# Altium PCB pumpController.PcbDoc
Units mm, origin at the board's own origin, x right, y up, seen from the top; angles counter-clockwise.
Board outline 73.76 x 46.73 mm, 2 copper layers (Top Layer, Bottom Layer); 53 components, 38 nets, 193 pads, 42 vias.
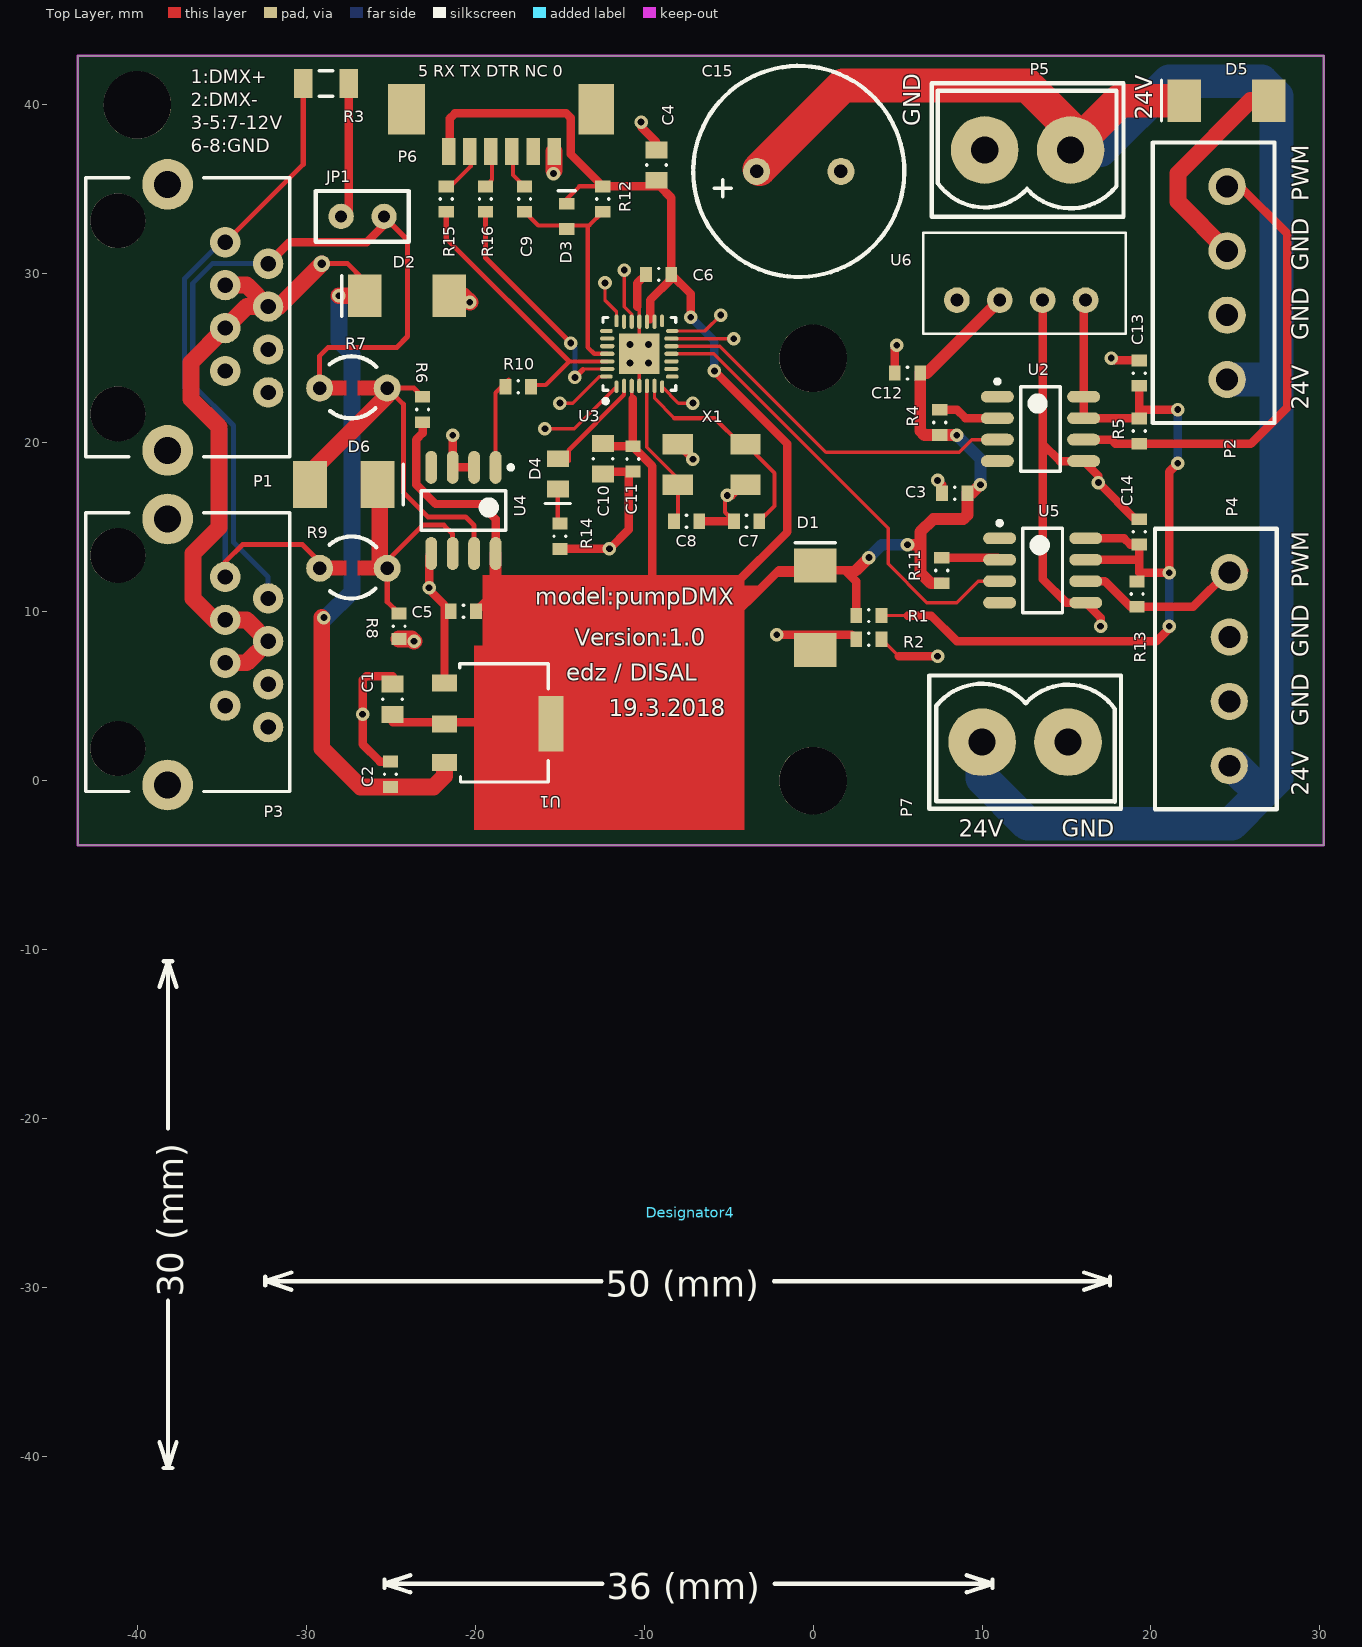
[diagram p0: Top Layer view]
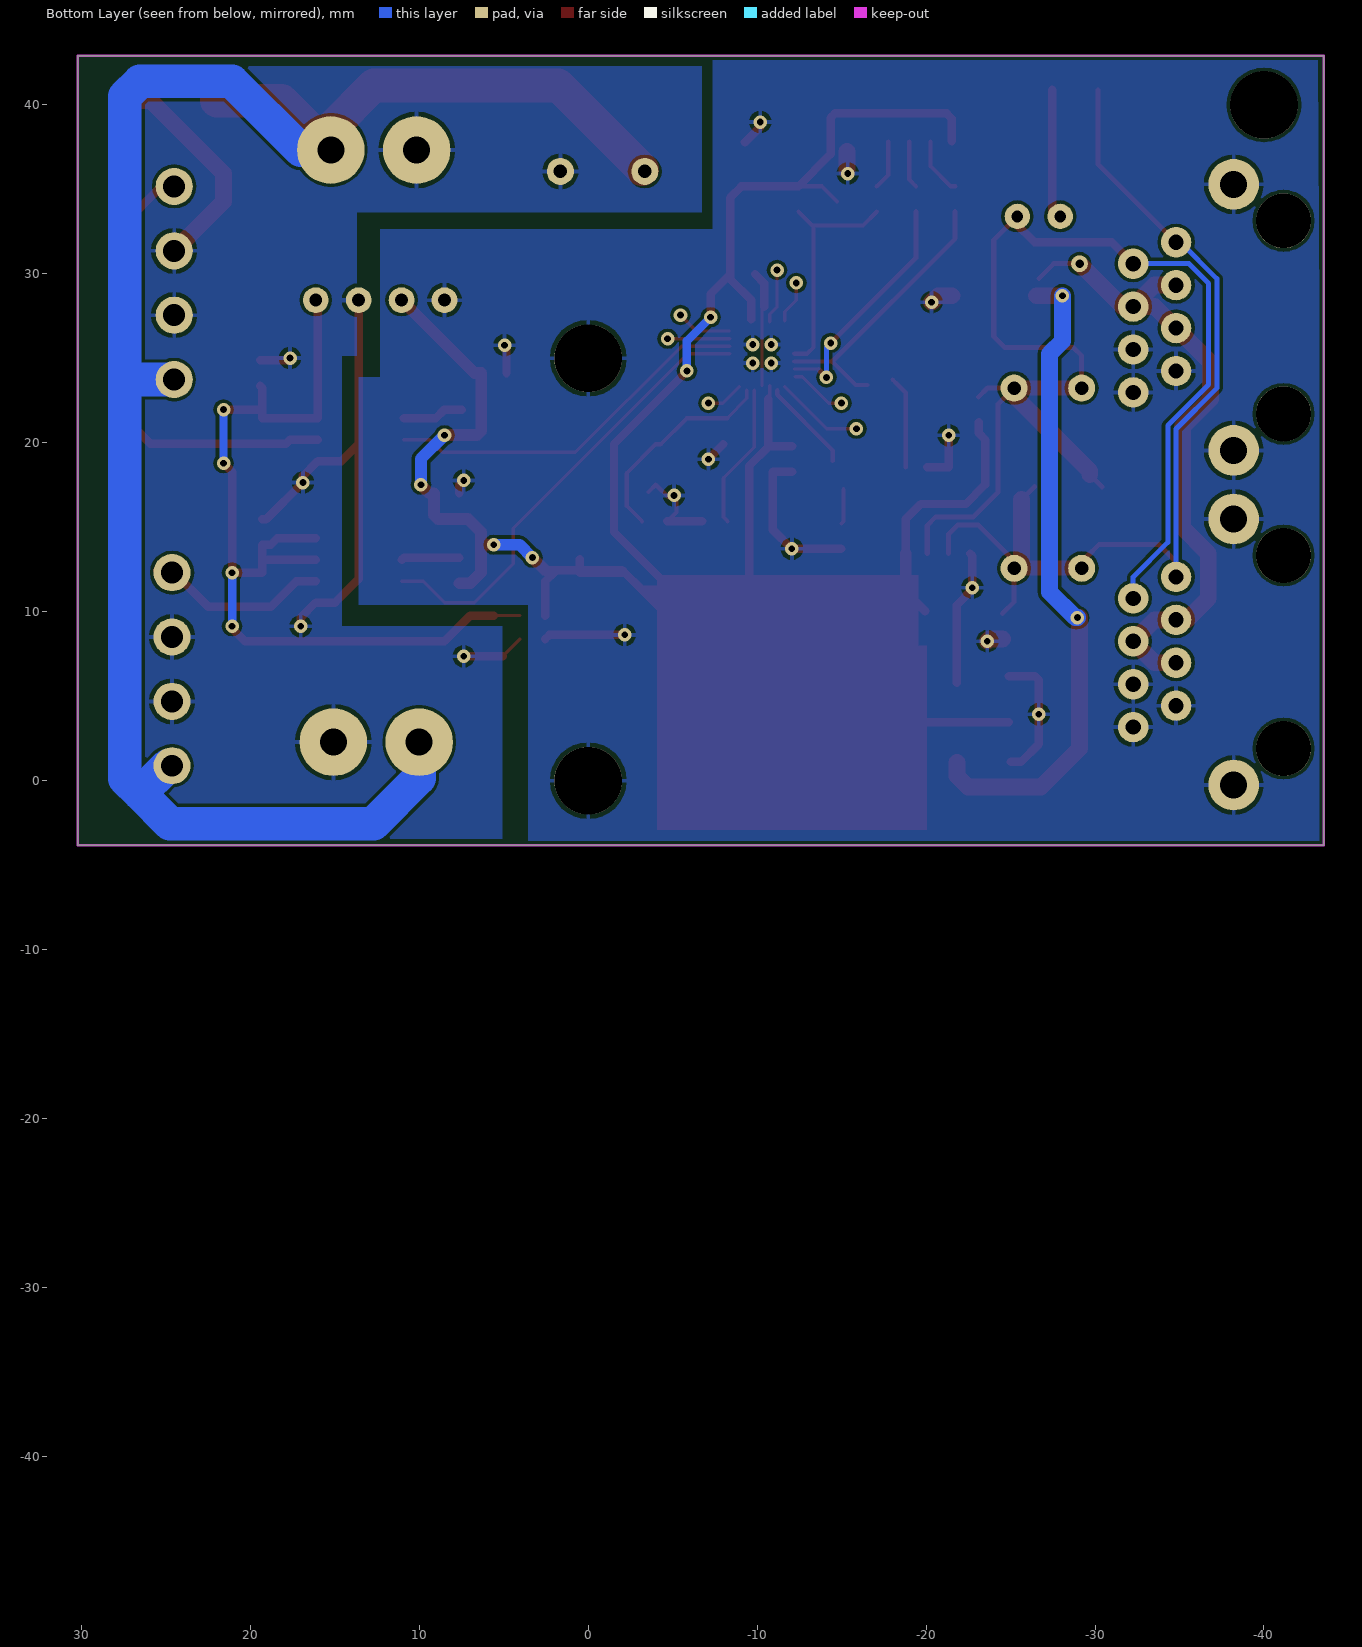
[diagram p1: Bottom Layer view, seen from below]

## Layer stack, top to bottom
Top Solder: solder mask 0.0102, Solder Resist, Dk 3.5
Top Layer: signal copper 0.0356
Dielectric 1: dielectric 0.32, FR-4, Dk 4.8
Bottom Layer: signal copper 0.0356
Bottom Solder: solder mask 0.0102, Solder Resist, Dk 3.5

## Board outline
-43.536,-3.815 30.226,-3.815 30.226,42.919 -43.536,42.919

## Design rules (kind name [scope] priority, off if disabled: settings)
Clearance [All] p1: gap=0.19 ignorepadtopadclearanceinfootprint=FALSE except(0: Arc-Hole Track-Hole SMDPad-Hole THPad-Hole Via-Hole Fill-Hole Poly-Hole Region-Hole Text-Hole)
HoleSize [All] p1: absolutevalues=TRUE maxlimit=10 minlimit=0.025 maxpercent=80.000 minpercent=20.000
PolygonConnect [All] p1: connectstyle=Relief reliefconductorwidth=0.254 reliefentries=4 polygonreliefangle="90 Angle" airgapwidth=0.254
RoutingVias [All] p1: holewidth=0.4 width=0.8 viastyle="Through Hole" minholewidth=0.4 minwidth=0.8 maxholewidth=0.4 maxwidth=0.8
SilkToSilkClearance [All] p1: silktosilkclearance=0.15
SilkToSolderMaskClearance [IsPad] p1: minsilkscreentomaskgap=0.15 clearancetoexposedcopper=TRUE
SolderMaskExpansion [All] p1: expansion=0.102
Width [All] p1: maxlimit=5 minlimit=0.2 preferedwidth=0.254
27 further rules are at their usual default settings.

## Components (designator, comment, footprint, x,y, rotation, side; value= is the part's Value field where it differs from the comment)
C1 "10uF" 0805 -24.892,4.821 r90 top
C2 "100nF" 0603 -25.019,0.376 r270 top
C3 "100nF" 0603 8.382,17.013 r0 top
C4 "10uF" 0805 -9.271,36.444 r90 top
C5 "100nF" 0603 -20.701,10.028 r0 top
C6 "100nF" 0603 -9.144,29.967 r0 top
C7 "22pF" 0603 -3.937,15.362 r180 top
C8 "22pF" 0603 -7.493,15.362 r0 top
C9 "100nF" 0603 -17.082,34.43 r90 top
C10 "10uF" 0805 -12.446,19.05 r270 top
C11 "100nF" 0603 -10.668,19.045 r270 top
C12 "100nF" 0603 5.588,24.125 r0 top
C13 "100nF" 0603 19.304,24.125 r90 top
C14 "100nF" 0603 19.304,14.727 r90 top
C15 "1000uF" CAPARADIALD12.5H20F5 1.651,36.063 r180 top
D1 "not mounted" MELF 0.127,7.742 r90 top value=5.1V
D2 "SS34" MELF -21.543,28.702 r180 top
D3 "ZLLS350TA" 0603pol -14.58,33.401 r90 top
D4 "GREEN" 0805pol -15.113,18.156 r270 top
D5 "SS34" MELF 26.971,40.254 r180 top
D6 "P008A" DO-214 -29.781,17.526 r0 top
Designator4 "Comment" "E-REGISTRATION STENCIL_EUROCIRUIT" -25.273,-10.541 r0 top
JP1 "Jumper DMX Terminal resistor" Jumper -27.94,33.401 r0 top
P1 "DMX" RJ45__socket_right -32.258,24.252 r180 top
P2 "Header 4" PHO_3.81_180_4x 24.511,23.744 r90 top
P3 "DMX" RJ45__socket_right -32.258,4.44 r180 top
P4 "Header 4" PHO_3.81_180_4x 24.638,0.884 r90 top
P5 "24V" "ALIME 5_08 180" 10.16,37.333 r0 top
P6 "Header 6" Header6_1.25_micro_JST_Axial -15.327,37.251 r180 top
P7 "24V" "ALIME 5_08 180" 15.088,2.281 r180 top
R1 "100R" 0603 3.302,9.774 r0 top
R2 "100R" 0603 3.302,8.377 r0 top
R3 "120R" 1206 -28.829,41.275 r180 top
R4 "470R" 0603 7.493,21.204 r90 top
R5 "10k" 0603 19.304,20.696 r270 top
R6 "10k" 0603 -23.114,21.971 r90 top
R7 "1K" MZ6 -29.21,23.241 r0 top
R8 "10k" 0603 -24.511,9.144 r270 top
R9 "1K" MZ6 -29.21,12.573 r0 top
R10 "1K" 0603 -17.45,23.317 r0 top
R11 "470R" 0603 7.62,12.441 r90 top
R12 "100k" 0603 -12.446,34.43 r90 top
R13 "10k" 0603 19.177,11.044 r270 top
R14 "2k2" 0603 -14.986,14.473 r270 top
R15 "100R" 0603 -21.717,34.43 r270 top value=100k
R16 "100R" 0603 -19.399,34.43 r270 top value=100k
U1 "LD1117S50CTR" SOT-223 -18.669,3.424 r270 top value=5V
U2 "HCPL-0600" so-8 13.462,20.823 r0 top
U3 "ATMEGA328P" ATM328P_MMH -10.287,27.168 r90 top
U4 "LTC485IS8  (év. CS8)" so-8 -20.701,15.997 r270 top
U5 "HCPL-0600" so-8 13.589,12.441 r0 top
U6 "NKE0505SC" SIL4 8.509,28.443 r0 top
X1 "8MHz" osc -6.564,20.378 r0 top

## Footprints (in the part's own frame and the unit in brackets; to place one, negate y for a bottom-side part, rotate by r counter-clockwise, add the part's x,y. Pads: shape width x height; smd on the part's side, far side on the other; paste and mask are expansions set on the pad)
0603 [mm] "Chip Resistor, Body 1.6x0.8mm, IPC High Density, EIA 0603"
  rect 0.7x0.9 smd: 1(-0.75,0) 2(0.75,0)
  silkscreen extent -0.01,-0.35 0.01,0.35, body extent -0.85,-0.48 0.85,0.48, height 0.6
0603pol [mm] "Chip Resistor, Body 1.6x0.8mm, IPC High Density, EIA 0603"
  rect 0.7x0.9 smd: 1(-0.75,0) 2(0.75,0)
  silkscreen extent 1.52,-0.51 1.52,0.51, body extent -0.85,-0.48 0.85,0.48, height 0.6
0805 [mm] "Chip Resistor, Body 2.0x1.3mm, IPC High Density, EIA 0805"
  rect 1x1.3 smd: 1(-0.9,0) 2(0.9,0)
  silkscreen extent -0.01,-0.58 0.01,0.58, body extent -1.07,-0.7 1.07,0.7, height 0.65
0805pol [mm] "Chip Resistor, Body 2.0x1.3mm, IPC High Density, EIA 0805"
  rect 1x1.3 smd: 1(-0.9,0) 2(0.9,0)
  silkscreen extent 1.75,-0.75 1.75,0.75, body extent -1.07,-0.7 1.07,0.7, height 0.65
1206 [mm] "Chip Resistor, Body 3.2x1.6mm, IPC High Density, EIA 1206"
  rect 1.1x1.7 smd: 1(-1.35,0) 2(1.35,0)
  silkscreen extent -0.4,-0.75 0.4,0.75, body extent -1.68,-0.87 1.68,0.87, height 0.7
"ALIME 5_08 180" [mm]
  round 4 hole 1.6: 1(0,0) 2(5.08,0)
  silkscreen extent -3.14,-3.95 8.22,3.95, body extent -3.54,-3.8 8.46,4.7, height 12.01
ATM328P_MMH [mm] "QFN, 28-Leads, Body 3.98x3.98mm, Pitch 0.45mm, Thermal Pad 2.40x2.40mm, IPC Medium Density"
  oval 0.75x0.25 smd paste-0.05: 1(-3.85,1.35) 7(-3.85,-1.35) 15(0.05,-1.35) 21(0.05,1.35)
  oval 0.85x0.25 smd paste-0.05: 2(-3.8,0.9) 3(-3.8,0.45) 4(-3.8,0) 5(-3.8,-0.45) 6(-3.8,-0.9) 16(0,-0.9) 17(0,-0.45) 18(0,0) 19(0,0.45) 20(0,0.9)
  oval 0.25x0.75 smd paste-0.05: 8(-3.25,-1.95) 14(-0.55,-1.95) 22(-0.55,1.95) 28(-3.25,1.95)
  oval 0.25x0.85 smd paste-0.05: 9(-2.8,-1.9) 10(-2.35,-1.9) 11(-1.9,-1.9) 12(-1.45,-1.9) 13(-1,-1.9) 23(-1,1.9) 24(-1.45,1.9) 25(-1.9,1.9) 26(-2.35,1.9) 27(-2.8,1.9)
  rect 2.4x2.4 smd paste-5 mask-0.102: 29(-1.9,0)
  silkscreen extent -4.82,-2.15 0.25,2.15, body extent -3.9,-2 0.1,2, height 1
CAPARADIALD12.5H20F5 [mm]
  round 1.6 hole 0.8: 1(0,0) 2(5,0)
  silkscreen extent -3.75,-6.25 8.75,6.25, body extent -3.75,-6.25 8.75,6.25, height 20
DO-214 [mm] "P008"
  rect 2x2.8 smd: 1(0,0) 2(4,0)
  silkscreen extent 5.51,-1.21 5.51,1.19, body extent -0.5,-1 4.62,1, height 2
"E-REGISTRATION STENCIL_EUROCIRUIT" [mm]
  round 0 hole 2.98: 3(0,0) 3(36,0)
  round 0 hole 5.01: 5(0,-30) 5(36,-30)
  silkscreen extent -13.42,-37.51 42.85,-0.15, body extent -7.04,-37.9 41.78,-23.06, height 5
Header6_1.25_micro_JST_Axial [mm] "micro_JST from Aliexpress"
  rect 0.8x1.6 smd: 1(6.25,0) 2(5,0) 3(3.75,0) 4(2.5,0) 5(1.25,0) 6(0,0)
  rect 2.2x3 smd: 7(8.75,-2.5)
  rect 2.1x3 smd: 8(-2.5,-2.5)
  body extent -3.28,-3.76 9.37,0.44, height 4.71
Jumper [mm]
  round 1.5 hole 0.7: 1(0,0) 2(2.54,0)
  silkscreen extent -1.5,-1.5 4,1.5
MELF [mm] "minimelf SOD-80"
  rect 2x2.5 smd: 1(0,0) 2(5,0)
  silkscreen extent 6.35,-1.2 6.35,1.2, body extent -0.5,-1 5.5,1, height 2
MZ6 [mm] "PTC 1K"
  round 1.6 hole 0.8: 1(0,0) 2(4,0)
  Top Layer region: 2.235,-0.432 3.429,-0.432 3.429,0.457 2.235,0.457
  Top Layer region: 0.635,-0.432 1.6,-0.432 1.6,0.457 0.635,0.457
  silkscreen extent 0.58,-1.8 3.36,1.88
osc [mm]
  rect 1.8x1.2 smd: 1(2.563,-0.457) 2(-1.437,-2.857) 3(-1.437,-0.457) 3(2.563,-2.857)
  body extent -2.12,-3.3 3.32,0, height 1
PHO_3.81_180_4x [mm] "Connector phoenix"
  round 2.2 hole 1.3: 1(0,0) 2(3.81,0) 3(7.62,0) 4(11.43,0)
  silkscreen extent -2.57,-2.8 14.03,4.4, body extent -2.65,-3.02 13.98,4.23, height 9.21
RJ45__socket_right [mm] "Digikey A104932-ND"
  round 3 hole 1.6: 0(5.95,4.7) 0(5.95,-11.05)
  round 1.8 hole 0.9: 1(2.54,-7.62) 2(0,-6.35) 3(2.54,-5.08) 4(0,-3.81) 5(2.54,-2.54) 6(0,-1.27) 7(2.54,0) 8(0,1.27)
  round 3.25 hole 3.25: 10(8.9,2.54) 10(8.9,-8.89)
  silkscreen extent -1.27,-11.43 10.8,5.08, body extent -1.27,-11.43 10.8,5.08, height 16.7
SIL4 [mil] "DC-DC isolated"
  round 60 hole 30: 1(0,0) 2(100,0) 3(200,0) 4(300,0)
  silkscreen extent -79,-79 394,157, body extent -79,-79 394,157, height 294
so-8 [mm] "SOIC, 8-Leads, Body 5.0x4.0mm (max), Pitch 1.27mm, IPC Medium Density"
  oval 1.95x0.7 smd: 1(-2.55,1.905) 2(-2.55,0.635) 3(-2.55,-0.635) 4(-2.55,-1.905) 5(2.55,-1.905) 6(2.55,-0.635) 7(2.55,0.635) 8(2.55,1.905)
  silkscreen extent -2.67,-2.5 1.17,2.93, body extent -3.1,-2.51 3.1,2.49, height 1.75
SOT-223 [mm] "Torex low cost stab"
  rect 1x1.5 smd: 1(-2.358,-3.15) 2(0.058,-3.15) 3(2.358,-3.15)
  rect 3.3x1.5 smd: 4(0.058,3.15)
  silkscreen extent -3.5,-2.25 3.5,3, body extent -3.56,-2.29 3.56,3.05, height 2

## Part data
C1 C2 C3 C4 C5 C6 C7 C8 C9 C10 C11 C12 C13 C14: library part C, "Capacitor"
  C1 C4 C10: name=C2012X5R1A106K125AB
  C2 C3 C5 C6 C9 C11 C12 C13 C14: name=C100nF25V0603X7R
  C7 C8: name=C0603Set
C15: library part Cp, "Capacitor", name=UVR1V102MHD
D1: library part D_Zener, "Diode", name=Zener5V
D2 D5: library part SMS120, "Schottky Diode 1A 0.5V 20V", name=SS34
D3: library part D_schottky, "Shottky diode", name=ZLLS350TA
D4: library part LED, "LED green", Supplier Part Number 1=1716766, name=OVS-0804, status=4, Supplier 1=Farnell
D6: library part D_Diac, "Diac", name=P008A
JP1 P5 P7: library part "Header 2", "Header, 4-Pin, Dual row"
  JP1: name=connectorJumper
  P5 P7: LatestRevisionDate=17-Jul-2002, LatestRevisionNote="Re-released for DXP Platform.", name=CON_phoenix_5.01_180_2x, Publisher="Altium Limited"
P1 P3: library part RJ45, name=RJ45__socket_right
P2 P4: "Header, 4-Pin, single row", LatestRevisionDate=17-Jul-2002, LatestRevisionNote="Re-released for DXP Platform.", name=CON_phoenix_3.81_180_4x, Publisher="Altium Limited"
P6: "Header,6-Pin", LatestRevisionDate=17-Jul-2002, LatestRevisionNote="Re-released for DXP Platform.", name=Header6_1.25_90deg_smd_Micro_JST, Publisher="Altium Limited"
R1 R2 R3 R4 R5 R6 R8 R10 R11 R12 R13 R14 R15 R16: library part R, "Resistor"
  R1 R2 R4 R5 R6 R8 R10 R11 R12 R13 R15 R16: name=R0603Set
  R3: name=R1206Set
  R14: name=R0603Set, state=3
R7 R9: library part R_ptc, "Resistor PTC", name=MZ6
U1: library part STAB_x17, "Linear regulator", name=LD1117S50CTR
U2 U5: "Logical optocoupler single SO8", name=HCPL-0600
U3: library part ATM328P, name=ATMEGA328P
U4: library part LTC485CS8, name=SP485EE
U6: library part DCDCisolated, "Isolated power supply", name=NKE0505SC
X1: library part Quartz, name=Quartz_8MHz_smd

## Free pads (board coordinates)
  round 1 hole 0.5: 2(-29.083,30.602)
  round 4 hole 4 unplated: 3(-40,40) 4(0,0) 4(0,25)

## Via types
v1: diameter 0.8, hole 0.4, Top Layer to Bottom Layer, 42 vias

## Nets (pads, with @x,y where several pads share a name; then routed paths per layer and width w, separated by ;. In a path a pad name is that pad's centre, name@x,y a point inside that pad or via, vN(x,y) a via of type N, cw(c..) or ccw(c..) an arc to the next point about the centre after c; other vN are vias at no path point)
5V: C1.1 C3.2 C4.1 C5.2 C6.2 C10.1 C11.1 C12.2 D1.2 D3.2 P6.1 R1.1 R4.1 R6.1 R11.1 R12.2 U1.2 U1.4 U3.3 U3.16 U3.17 U4.8 U6.2 | length 150.8
  Top Layer w0.2: C11.1@-10.737,19.795 U3.3
  Top Layer w0.254: D3.2@-14.731,34.286 -13.837,35.18 R12.2@-12.579,35.18
  Top Layer w0.5: C1.1@-24.892,3.471 -15.624,3.471 U1.4 ; R6.1 -23.114,20.574 -23.495,20.193 -23.495,17.521 -22.352,16.378 -19.685,16.378 -18.796,15.489 U4.8 ; P6.1@-21.51,37.841 -21.51,39.196 -21.209,39.497 -14.605,39.497 -14.351,39.243 -14.351,37.085 R12.2 -9.069,35.18 -8.394,34.505 C6.2 ; C5.2 -18.796,11.183 ; C10.1@-12.065,19.795 C11.1@-10.737,19.795 ; -10.668,22.601 C11.1 -10.668,19.767 -9.525,18.624 -9.525,11.171 ; -9.652,27.3 -9.652,28.448 -8.394,29.706 C6.2 ; -7.62,11.552 -7.366,11.552 ; -7.239,10.917 -3.556,10.917 ; v1(-7.239,27.427) -7.239,28.812 C6.2 ; v1(-5.842,24.252) -1.524,19.934 -1.524,14.727 -4.699,11.552 -7.366,11.552 ; -4.318,10.028 -4.318,10.155 -3.556,10.917 ; D1.2@0.508,13.123 D1.2@0.508,12.453 ; 1.981,12.37 2.552,11.799 R1.1 ; 2.552,12.453 D1.2@0.508,12.453 ; -7.366,11.552 -7.112,11.298 -3.175,11.298 ; -3.556,10.917 -3.175,11.298 ; -3.175,11.298 -2.154,12.319 ; -2.154,12.319 0.508,12.319 D1.2@0.508,12.453 ; -2.154,12.319 -2.02,12.453 D1.2@0.508,12.453
  Top Layer w0.7: -18.796,7.361 -18.796,11.183 U4.8 ; 2.552,12.453 v1(3.302,13.203) ; v1(5.588,13.965) 6.35,13.965 ; R11.1 6.973,11.691 6.35,12.314 6.35,13.965 ; v1(8.509,20.442) 8.497,20.454 R4.1 6.592,20.454 6.338,20.708 C12.2 6.731,24.125 U6.2 ; v1(9.906,17.521) 9.398,17.013 C3.2 9.132,15.731 8.89,15.489 7.112,15.489 6.35,14.727 6.35,13.965
  Bottom Layer w0.5: v1(-7.239,27.427) -5.842,26.03 v1(-5.842,24.252)
  Bottom Layer w0.7: v1(3.302,13.203) 4.064,13.965 v1(5.588,13.965) ; v1(8.509,20.442) 9.906,19.045 v1(9.906,17.521)
5V_out: C13.1 C14.1 R1.2 R5.1 R13.1 U2.7 U2.8 U5.7 U5.8 U6.4 | length 56
  Top Layer w0.2: R1.2 5.588,9.774
  Top Layer w0.5: 5.588,9.774 6.985,9.774 8.509,8.25 20.32,8.25 21.082,9.012 v1(21.082,9.139) ; U6.4@16.012,28.824 U2.8 U2.7 16.024,21.446 R5.1 19.304,21.966 ; U5.7 19.177,13.076 19.304,12.949 ; U5.8 18.415,14.346 18.784,13.977 C14.1 19.304,12.949 ; C13.1@19.431,23.375 19.304,23.248 19.304,21.966 ; v1(21.59,18.791) 21.082,18.283 v1(21.082,12.314) 19.304,12.314 19.304,12.949 ; v1(21.59,21.966) 19.304,21.966
  Bottom Layer w0.5: v1(21.082,9.139) v1(21.082,12.314) ; v1(21.59,18.791) v1(21.59,21.966)
7V: C2.2 D2.2 P1.3 P1.4 P1.5 P3.3 P3.4 P3.5 pad.2 U1.3 | length 78.4
  Top Layer w0.3: pad.2 -27.554,30.602 D2.2@-26.67,29.718
  Top Layer w1: P3.5 -33.528,6.98 P3.4 -33.528,9.52 P3.3@-34.671,9.52 ; P3.3 -35.428,9.52 -36.703,10.795 -36.703,13.457 -35.179,14.981 -35.179,20.95 -36.83,22.601 -36.83,24.76 P1.5 -33.528,28.062 P1.4 ; P1.3 -33.528,29.332 P1.4 ; v1@-29.083,9.652 -29.083,1.9 -26.797,-0.386 -22.479,-0.386 -21.819,0.274 U1.3 ; pad.2 -31.623,28.062 P1.4 ; v1(-28.067,28.702) D2.2
  Bottom Layer w1: v1(-28.956,9.652) -28.829,9.652 -27.305,11.176 -27.305,25.273 -28.067,26.035 v1(-28.067,28.702)
24V: C15.2 D5.2 P2.1 P4.1 P5.2 P7.2 | length 112.7
  Top Layer w2: C15.2@-3.175,36.195 1.773,41.143 12.7,41.143 15.24,38.603 P5.2 18.161,40.254 D5.2
  Bottom Layer w2: P7.2 10.008,0.147 12.705,-2.55 24.76,-2.55 26.543,-0.767 ; P5.2 17.018,37.333 21.082,41.397 26.543,41.397 27.437,40.503 27.437,23.744 ; P2.1 27.437,23.744 ; P4.1 24.892,0.884 26.543,-0.767 ; 26.543,-0.767 27.437,0.127 27.437,23.744
ADC1: U3.20
ADC2: U3.21 | length 2.5
  Top Layer w0.2: v1(-12.319,29.464) -12.319,28.448 -11.637,27.766 U3.21
ADC3: U3.22
ATM_RX: R10.2 R15.2 U3.26 | length 16.8
  Top Layer w0.254: R10.2@-16.535,23.419 -15.831,23.419 -14.44,24.81 -12.195,24.81 U3.26
  Top Layer w0.3: R15.2 -21.717,32.087 -14.44,24.81
ATM_TX: R16.2 U3.27 | length 14.1
  Top Layer w0.2: -13.625,24.343 -13.6,24.368 U3.27
  Top Layer w0.3: R16.2 -19.399,30.951 v1(-14.351,25.903) ; v1(-14.097,23.871) -13.625,24.343
  Bottom Layer w0.3: v1(-14.351,25.903) -14.097,25.649 v1(-14.097,23.871)
D+: P1.1 P3.1 R3.2 R9.1 | length 41.2
  Top Layer w0.3: P3.1 -34.798,12.954 -33.782,13.97 -30.226,13.97 -29.527,13.271 -29.527,12.636 -29.464,12.573 R9.1 ; P1.1 -30.179,36.491 R3.2@-30.179,40.889
  Top Layer w0.5: R9.1@-29.527,12.636 R9.1@-29.21,12.954
  Bottom Layer w0.3: P3.1 -34.798,20.823 -37.211,23.236 -37.211,29.713 -35.052,31.872 P1.1
D-: JP1.2 P1.2 P3.2 R7.1 | length 49.7
  Top Layer w0.3: P3.2 P3.2@-32.258,11.176 ; R7.1@-29.21,22.606 R7.1 -29.21,25.146 -28.702,25.654 -24.638,25.654 -24.003,26.289 -24.003,32.004 JP1.2
  Top Layer w0.5: P1.2 -30.983,31.877 -26.416,31.877 JP1.2@-25.273,33.02
  Bottom Layer w0.3: P3.2 -32.258,12.06 -34.308,14.11 -34.308,21.026 -36.721,23.439 -36.721,29.441 -35.56,30.602 P1.2
DIO0: U3.28 | length 3.4
  Top Layer w0.2: v1(-14.986,22.352) -14.224,22.352 -12.658,23.918 U3.28
DTR: C9.2 P6.4 | length 2.9
  Top Layer w0.254: P6.4@-17.76,37.841 -17.76,35.858 C9.2
GND: C1.2 C2.1 C3.1 C4.2 C5.1 C6.1 C7.2 C8.2 C10.2 C11.2 C12.1 D1.1 D2.1 P1.0 P1.6 P1.7 P1.8 P3.0 P3.6 P3.7 P3.8 P6.6 pad.4 R2.1 R8.2 R14.2 U1.1 U3.4 U3.18 U3.29 U4.2 U4.3 U4.5 U6.1 X1.3 | length 54.9
  Top Layer w0.2: -10.414,28.062 -10.287,27.935 U3.18 U3.29 U3.4
  Top Layer w0.254: C7.2 -5.219,15.894 -5.219,16.886 v1(-5.08,16.886) -4.89,16.886 -4.763,16.759 -4.001,17.521 X1.3@-3.568,17.088
  Top Layer w0.5: C2.1 -25.642,1.126 -26.67,2.154 v1(-26.67,3.932) -26.67,5.964 -26.463,6.171 C1.2@-24.892,6.171 ; U4.5 -22.733,13.32 v1(-22.733,11.425) -22.733,11.31 -21.819,10.396 U1.1 ; v1(-21.336,20.442) U4.3 U4.2 ; v1@-15.489,35.941 v1(-15.367,35.941) ; R14.2 v1(-12.053,13.723) -10.922,14.854 -10.922,18.295 C10.2@-12.065,18.295 ; -10.414,28.062 -10.414,29.447 C6.1 ; v1(-10.185,38.989) -10.185,38.708 C4.2@-9.271,37.794 ; X1.3@-8.001,19.921 v1(-7.112,19.032) v1@-7.112,18.918 ; C8.2 C7.2 ; v1(-2.159,8.631) 2.298,8.631 R2.1 ; C12.1 4.838,25.661 v1(4.953,25.776) ; v1(7.366,17.775) 7.632,17.509 C3.1
  Top Layer w1: R8.2 -23.761,8.394 v1(-23.622,8.255) ; D2.1 -20.701,28.702 v1(-20.32,28.321) ; v1@-15.327,36.103 P6.6
  other v1: -10.837,24.718 -9.737,24.718 -10.837,25.818 -9.737,25.818
GND_pwr: C13.2 C14.2 C15.1 D5.1 P2.2 P2.3 P4.2 P4.3 P5.1 P7.1 R2.2 U2.5 U5.5 U6.3 | length 47.7
  Top Layer w0.2: R2.2 5.068,7.361
  Top Layer w0.5: 5.068,7.361 v1(7.366,7.361) ; U6.3 13.589,19.934 ; v1(17.018,9.139) 17.018,9.657 U5.5 14.986,10.536 13.589,11.933 13.589,19.934 ; v1(17.653,25.014) 17.792,24.875 C13.2 C13.2@19.431,24.875 ; C14.2 19.062,15.477 v1(16.891,17.648) 16.891,18.039 U2.5 14.605,18.918 13.589,19.934
  Top Layer w1: P2.3 21.59,34.285 21.59,35.941 25.903,40.254 D5.1
INT: U3.1 | length 5.3
  Top Layer w0.2: v1(-15.875,20.828) -14.127,20.828 U3.1
NetD4_1: D4.1 U3.2 | length 5.5
  Top Layer w0.254: D4.1@-14.467,18.929 -14.467,19.564 -11.189,22.842 U3.2@-11.189,23.114
NetD4_2: D4.2 R14.1 | length 2.1
  Top Layer w0.254: D4.2 -15.113,15.35 R14.1
NetD6_1: D6.1 R6.2 R7.2 U4.7 | length 23.5
  Top Layer w0.3: D6.1@-30.416,17.399 D6.1@-29.686,18.129 ; R7.2@-25.21,22.796 R7.2 ; R6.2 -23.634,23.241 R7.2 ; U4.7 -20.066,15.108 -20.574,15.616 -22.805,15.616 -24.257,17.068 -24.257,22.288 R7.2
  Top Layer w1: D6.1@-29.686,18.129 -29.686,18.32 R7.2@-25.21,22.796
NetD6_2: D6.2 R8.1 R9.2 U4.6 | length 14.3
  Top Layer w0.3: D6.2@-26.416,17.399 D6.2@-25.654,16.637 ; R9.2 -25.21,10.593 R8.1 ; R9.2@-25.146,13.081 -23.101,15.126 -21.862,15.126 -21.336,14.6 U4.6
  Top Layer w1: D6.2@-25.654,16.637 -25.654,13.017 R9.2
NetJP1_1: JP1.1 R3.1 | length 7.4
  Top Layer w0.5: JP1.1@-27.479,33.528 R3.1@-27.479,40.889
NetP2_4: P2.4 R5.2 U2.6 | length 27.3
  Top Layer w0.5: U2.6 17.653,20.188 17.895,19.946 R5.2 25.92,19.946 28.067,22.093 28.067,32.38 P2.4@25.273,35.174
NetP4_4: P4.4 R13.2 U5.6 | length 10.9
  Top Layer w0.5: U5.6 17.272,11.806 18.784,10.294 R13.2 22.491,10.294 24.638,12.441 P4.4@25.527,12.441
NetP6_2: P6.2 R15.1 | length 3.4
  Top Layer w0.254: R15.1 -21.457,35.18 -20.26,36.377 P6.2@-20.26,37.841
NetP6_3: P6.3 R16.1 | length 2.8
  Top Layer w0.254: R16.1 -19.01,35.569 P6.3@-19.01,37.841
NetR4_2: R4.2 U2.2 | length 3.6
  Top Layer w0.5: R4.2 8.521,21.954 9.017,21.458 U2.2
NetR10_1: R10.1 U4.1 | length 5.5
  Top Layer w0.254: U4.1 -18.796,22.962 -18.32,23.438 R10.1@-18.018,23.74
NetR11_2: R11.2 U5.2 | length 3.5
  Top Layer w0.5: R11.2 10.924,13.191 U5.2
NetU2_3: U2.3 U3.12 | length 22.2
  Top Layer w0.2: U3.12 -5.525,25.718 0.762,19.431 8.641,19.431 9.398,20.188 U2.3
NetU3_11: U3.11 U5.3 | length 27.3
  Top Layer w0.2: U3.11 -5.882,25.268 4.445,14.941 4.445,12.827 6.736,10.536 8.504,10.536 9.774,11.806 U5.3
PB3: U3.13 | length 3.7
  Top Layer w0.2: U3.13 -4.705,26.168 v1(-4.699,26.162)
PB4: U3.14 | length 3.3
  Top Layer w0.2: U3.14 -6.402,26.618 v1(-5.461,27.559)
PC0: U3.19 | length 3.2
  Top Layer w0.2: v1(-11.176,30.226) -11.176,28.06 -10.737,27.621 U3.19
PD5: U3.7 | length 2.2
  Top Layer w0.2: U3.7 -7.971,22.352 v1(-7.112,22.352)
RST: C9.1 D3.1 R12.1 U3.25 | length 13.9
  Top Layer w0.254: C9.1 -16.269,32.868 -13.258,32.868 ; R12.1 -13.258,32.868 ; U3.25 -12.954,25.268 -13.335,25.649 -13.335,32.791 -13.258,32.868
SCK: U3.15
XTAL1: C7.1 U3.6 X1.1 | length 12.6
  Top Layer w0.2: U3.6@-9.387,23.114 -9.387,22.625 -8.22,21.458
  Top Layer w0.254: -8.22,21.458 -5.837,21.458 -4.3,19.921 X1.1 -2.286,18.206 -2.286,16.263 C7.1
XTAL2: C8.1 U3.5 X1.2 | length 8.6
  Top Layer w0.2: U3.5@-9.837,23.114 -9.837,19.738 X1.2@-8.001,17.902
  Top Layer w0.254: C8.1 -8.001,15.604 X1.2 X1.2@-8.001,17.902
pads on no net: Designator4.3 Designator4.5 P1.10 P3.10 P6.5 P6.7 P6.8 U2.1 U2.4 U3.8 U3.9 U3.10 U3.23 U3.24 U4.4 U5.1 U5.4

## Polygon pours and split planes (outlines as drawn)
GND_pwr on Bottom Layer "GND" (solid, remove dead copper, pour order 2): -6.731,42.286 -6.731,33.65 13.716,33.65 13.716,25.141 14.605,25.141 14.605,9.139 5.08,9.139 5.08,-2.418 5.08,-3.434 28.067,-3.434 28.067,42.159 27.94,42.286
GND on Bottom Layer "GND" (solid, remove dead copper, pour order 0): -43.175,42.918 -7.366,42.87 -7.366,32.634 12.319,32.634 12.319,23.871 13.589,23.871 13.589,10.41 3.555,10.41 3.555,-3.815 -3.683,-3.815 -23.495,-3.815 -33.401,-3.815 -43.458,-3.89

## Keep-outs
Keep-Out Layer:
  the board outline again, w0.15

## Other copper
Top Layer:
  rectangle net 5V: -19.558,5.837 -4.064,12.187
  rectangle net 5V: -20.066,-2.926 -4.064,7.996

## Silkscreen, mask and mechanical layers (free items; w line width, h text height)
Top Overlay:
  text "5 RX TX DTR NC 0" at -23.368,41.656 h0.7
  text "1:DMX+" at -36.83,41.275 h0.8
  text "2:DMX-" at -36.83,39.92 h0.8
  text "24V" at 20.066,39.111 h1 r90
  text "GND" at 6.35,38.735 h1 r90
  text "3-5:7-12V" at -36.83,38.566 h0.8
  text "6-8:GND" at -36.83,37.211 h0.8
  text "PWM" at 29.337,34.285 h1 r90
  text "GND" at 29.337,30.179 h1 r90
  text "GND" at 29.337,26.072 h1 r90
  text "24V" at 29.337,21.966 h1 r90
  text "PWM" at 29.337,11.425 h1 r90
  text "model:pumpDMX" at -16.438,10.414 h1
  text "Version:1.0" at -14.105,7.991 h1
  text "GND" at 29.337,7.319 h1 r90
  text "edz / DISAL" at -14.605,5.9 h1
  text "19.3.2018" at -12.106,3.81 h1
  text "GND" at 29.337,3.212 h1 r90
  text "24V" at 29.337,-0.894 h1 r90
  text "24V" at 8.636,-3.307 h1
  text "GND" at 14.732,-3.307 h1
Top Solder:
  rectangle: -15.824,35.865 -14.859,36.576
  rectangle: -21.971,36.347 -14.732,38.73
  rectangle: -12.446,22.982 -11.811,23.744
  rectangle: -12.319,26.665 -11.684,27.3
  rectangle: -8.89,26.665 -8.382,27.173
  rectangle: -8.89,23.363 -8.382,23.871

## Dimensions
37.211,42.795 to 31.75,-3.687 on Top Overlay
-43.434,44.445 to 30.226,45.334 on Top Overlay

## Text inside footprints (layer, text, board x,y; h text height)
Designator4: Top Overlay "30 (mm)" at -37.273,-30.541 h1.52 r90; Top Overlay "36 (mm)" at -12.227,-48.455 h1.52; Top Overlay "50 (mm)" at -12.273,-30.541 h1.52; Top Paste "90 (mm)" at -12.123,124.545 h1.52; Top Paste "175 (mm)" at -58.359,22.474 h1.52 r90